# EAGLE board clock01 (EAGLE 5.01)

Size 97.77 x 83.49 mm. Coordinates in mm from the lower left corner, seen from the top.
Outline: 0,0 97.77,0 97.77,83.49 0,83.49 0,0
Copper layers (1*16): Top 0.035mm / dielectric 1.5mm / Bottom 0.035mm
Design rules "default": minimum track width 10mil, minimum drill 24mil, track to track 8mil, track to pad 8mil, pad to pad 8mil, via to via 8mil, smd to smd 8mil, copper to edge 40mil, drill to drill 8mil, minimum pad ring 10mil, minimum via ring 8mil, stop-mask expansion 4mil, vias tented up to drill 0mil, thermal gap 10mil
Net classes: 0 default: width 0.6 mm
Holes 8.2 mm at 48.89,41.74
Holes 2 mm at 6.13,5.47 6.13,78.02 92.33,5.67 92.33,78.22

## Footprints (pad centres in the part's own frame; a part is rotated, then mirrored left to right if it is on the bottom)
TO-92B = drill 0.813 pad 1.422 square: 1 -2.54,0 | drill 0.813 pad 1.422 octagon: 2 0,0; 3 2.54,0
1X02 = drill 0.991 pad 1.499 square: 1 -1.27,0 | drill 0.991 pad 1.499 octagon: 2 1.27,0
B_BH2032 = drill 1.2 pad 2.5 square: B+ -13.716,0 | drill 1.2 pad 2.5 round: B- 6.35,0
CR05_2,5 = drill 0.813 pad 1.499 square: 1 -1.27,0 | drill 0.813 pad 1.499 octagon: 2 1.27,0
DIL-08 = drill 0.813 pad 1.499 square: 1 -3.81,-3.81 | drill 0.813 pad 1.499 octagon: 2 -1.27,-3.81; 3 1.27,-3.81; 4 3.81,-3.81; 5 3.81,3.81; 6 1.27,3.81; 7 -1.27,3.81; 8 -3.81,3.81
TO-92B' = drill 0.813 pad 1.499 square: 1 -2.54,0 | drill 0.813 pad 1.499 octagon: 2 0,0; 3 2.54,0
DIL28-3 = drill 0.813 long: 1 -16.51,-3.81; 2 -13.97,-3.81; 3 -11.43,-3.81; 4 -8.89,-3.81; 5 -6.35,-3.81; 6 -3.81,-3.81; 7 -1.27,-3.81; 8 1.27,-3.81; 9 3.81,-3.81; 10 6.35,-3.81; 11 8.89,-3.81; 12 11.43,-3.81; 13 13.97,-3.81; 14 16.51,-3.81; 15 16.51,3.81; 16 13.97,3.81; 17 11.43,3.81; 18 8.89,3.81; 19 6.35,3.81; 20 3.81,3.81; 21 1.27,3.81; 22 -1.27,3.81; 23 -3.81,3.81; 24 -6.35,3.81; 25 -8.89,3.81; 26 -11.43,3.81; 27 -13.97,3.81; 28 -16.51,3.81
LH-10 = drill 0.991 pad 1.499 square: 1 -5.08,-1.27 | drill 0.991 pad 1.499 octagon: 2 -5.08,1.27; 3 -2.54,-1.27; 4 -2.54,1.27; 5 0,-1.27; 6 0,1.27; 7 2.54,-1.27; 8 2.54,1.27; 9 5.08,-1.27; 10 5.08,1.27
LH-20 = drill 1 pad 1.499 square: 1 -11.43,-1.27 | drill 1 pad 1.499 octagon: 2 -11.43,1.27; 3 -8.89,-1.27; 4 -8.89,1.27; 5 -6.35,-1.27; 6 -6.35,1.27; 7 -3.81,-1.27; 8 -3.81,1.27; 9 -1.27,-1.27; 10 -1.27,1.27; 11 1.27,-1.27; 12 1.27,1.27; 13 3.81,-1.27; 14 3.81,1.27; 15 6.35,-1.27; 16 6.35,1.27; 17 8.89,-1.27; 18 8.89,1.27; 19 11.43,-1.27; 20 11.43,1.27
TC26V = drill 0.813 round: 1 -1.27,0; 2 1.27,0
R2_10S = drill 0.991 pad 1.803 octagon: 1 -5.08,0; 2 5.08,0
RTRIM74W = drill 0.61 round: 1 -1.25,-2.5; 2 1.25,0; 3 -1.25,2.5
1X01 = drill 0.991 pad 1.499 square: 1 0,0
RN-5 = drill 0.813 pad 1.397 octagon: 1 -5.08,0; 2 -2.54,0; 3 0,0; 4 2.54,0; 5 5.08,0
2X02 = drill 0.991 pad 1.499 square: 1 -1.27,-1.27 | drill 0.991 pad 1.499 octagon: 2 -1.27,1.27; 3 1.27,-1.27; 4 1.27,1.27

## Placement (x,y rotation side)
78MH03  [TO-92B]  70.48,76.67 270 top
78MH05  [TO-92B]  52.7,76.67 270 top
BAT  [1X02]  13.33,74.13 180 top
BP1  [B_BH2032]  48.89,13.17 180 top
CE1  [CR05_2,5]  59.05,77.94 270 top
CE2  [CR05_2,5]  65.4,77.94 270 top
CE3  [CR05_2,5]  66.67,39.84 180 top
CE4  [CR05_2,5]  85.72,5.55 0 top
DS1307  DS1307  [DIL-08]  76.83,14.44 90 top
DS1820  DS1820  [TO-92B']  78.1,6.82 180 top
IC1  MEGA8-P  [DIL28-3]  65.4,30.95 0 top
K1  [LH-10]  89.53,52.54 90 top
K2  [LH-20]  89.53,25.87 90 top
Q1  [TC26V]  80.64,11.9 90 top
R1  [R2_10S]  74.29,20.79 0 top
R2  [R2_10S]  70.48,13.17 90 top
R3  [R2_10S]  71.75,23.33 0 top
R4  [R2_10S]  56.51,46.19 270 top
R10  [RTRIM74W]  93.34,67.78 0 top
R11  [RTRIM74W]  86.99,67.78 180 top
RF_IO  [1X01]  83.18,38.57 0 top
RN1  [RN-5]  81.91,48.73 270 top
SPEAKER  [1X02]  80.64,69.05 90 top
TL_RES  [2X02]  61.59,22.06 270 top

## Library data of the parts
78MH03 78MH05 = !LINEAR
BAT K1 K2 RF_IO SPEAKER TL_RES = !PINHEAD
BP1 = !ELMECH
CE1-CE4 R1-R4 RN1 = !DISCRET
DS1307 DS1820 = _dallas
IC1 = atmel
Q1 = crystal
R10 R11 = rcl

## Nets
+: BP1.B+ DS1307.3
GND: 78MH03.2 78MH05.2 BAT.2 BP1.B- CE1.2 CE2.2 CE3.2 CE4.2 DS1307.4 DS1820.1 IC1.8 IC1.22 K2.1 K2.12 K2.14 K2.15 R4.1 R10.3 R11.1 RN1.1 SPEAKER.2
N$1: 78MH03.3 78MH05.3 BAT.1
N$2: IC1.26 R11.2 R11.3 SPEAKER.1
N$4: 78MH03.1 CE2.1 K2.13
N$5: DS1820.2 IC1.13 R1.2
N$6: IC1.4 TL_RES.1
N$7: K2.3 R10.2
N$8: IC1.5 TL_RES.3
N$9: DS1307.1 Q1.1
N$10: DS1307.2 Q1.2
N$11: K1.7 K2.11
N$12: K1.1 K1.8
N$13: DS1307.6 IC1.12 R3.2
N$14: DS1307.5 IC1.11 R2.2
N$15: K2.16 RF_IO.1
N$16: IC1.2 K2.17
N$17: IC1.3 K2.18
N$18: IC1.6 TL_RES.2
N$19: IC1.1 TL_RES.4
PB0: IC1.14 K2.4
PB1: IC1.15 K2.5
PB2: IC1.16 K2.6
PB4: IC1.18 K2.7
PB5: IC1.19 K2.8
PB6: IC1.9 K2.9
PB7: IC1.10 K2.10
PC0: IC1.23 K1.2 RN1.5
PC1: IC1.24 K1.3 RN1.4
PC2: IC1.25 K1.4 RN1.3
PC4: IC1.27 K1.5 RN1.2
PC5: IC1.28 K1.6 R4.2
VCC: 78MH05.1 CE1.1 CE3.1 CE4.1 DS1307.8 DS1820.3 IC1.7 IC1.20 K2.2 R1.1 R2.1 R3.1 R10.1

## Tracks (layer width: path | path; a pad name or v marks a point on that pad's centre or on a via)
+  (1 unrouted)
GND  (20 unrouted)
N$1  (2 unrouted)
N$2  (3 unrouted)
N$4  (2 unrouted)
N$5  (2 unrouted)
N$6  (1 unrouted)
N$7  (1 unrouted)
N$8  (1 unrouted)
N$11  (1 unrouted)
N$12  (1 unrouted)
N$13  (2 unrouted)
N$14  (2 unrouted)
N$15  (1 unrouted)
N$16  (1 unrouted)
N$17  (1 unrouted)
N$18  (1 unrouted)
N$19  (1 unrouted)
PB0  (1 unrouted)
PB1  (1 unrouted)
PB2  (1 unrouted)
PB4  (1 unrouted)
PB5  (1 unrouted)
PB6  (1 unrouted)
PB7  (1 unrouted)
PC0  (2 unrouted)
PC1  (2 unrouted)
PC2  (2 unrouted)
PC4  (2 unrouted)
PC5  (2 unrouted)
VCC  (12 unrouted)